# Altium PCB R100.230.020.001-00 MeasInUI.PcbDoc
Units mm, origin at the board's own origin, x right, y up, seen from the top; angles counter-clockwise.
Board outline 60 x 50 mm, 2 copper layers (Top, Bottom), stack 1.571 mm thick; 43 components, 31 nets, 118 pads, 82 vias.
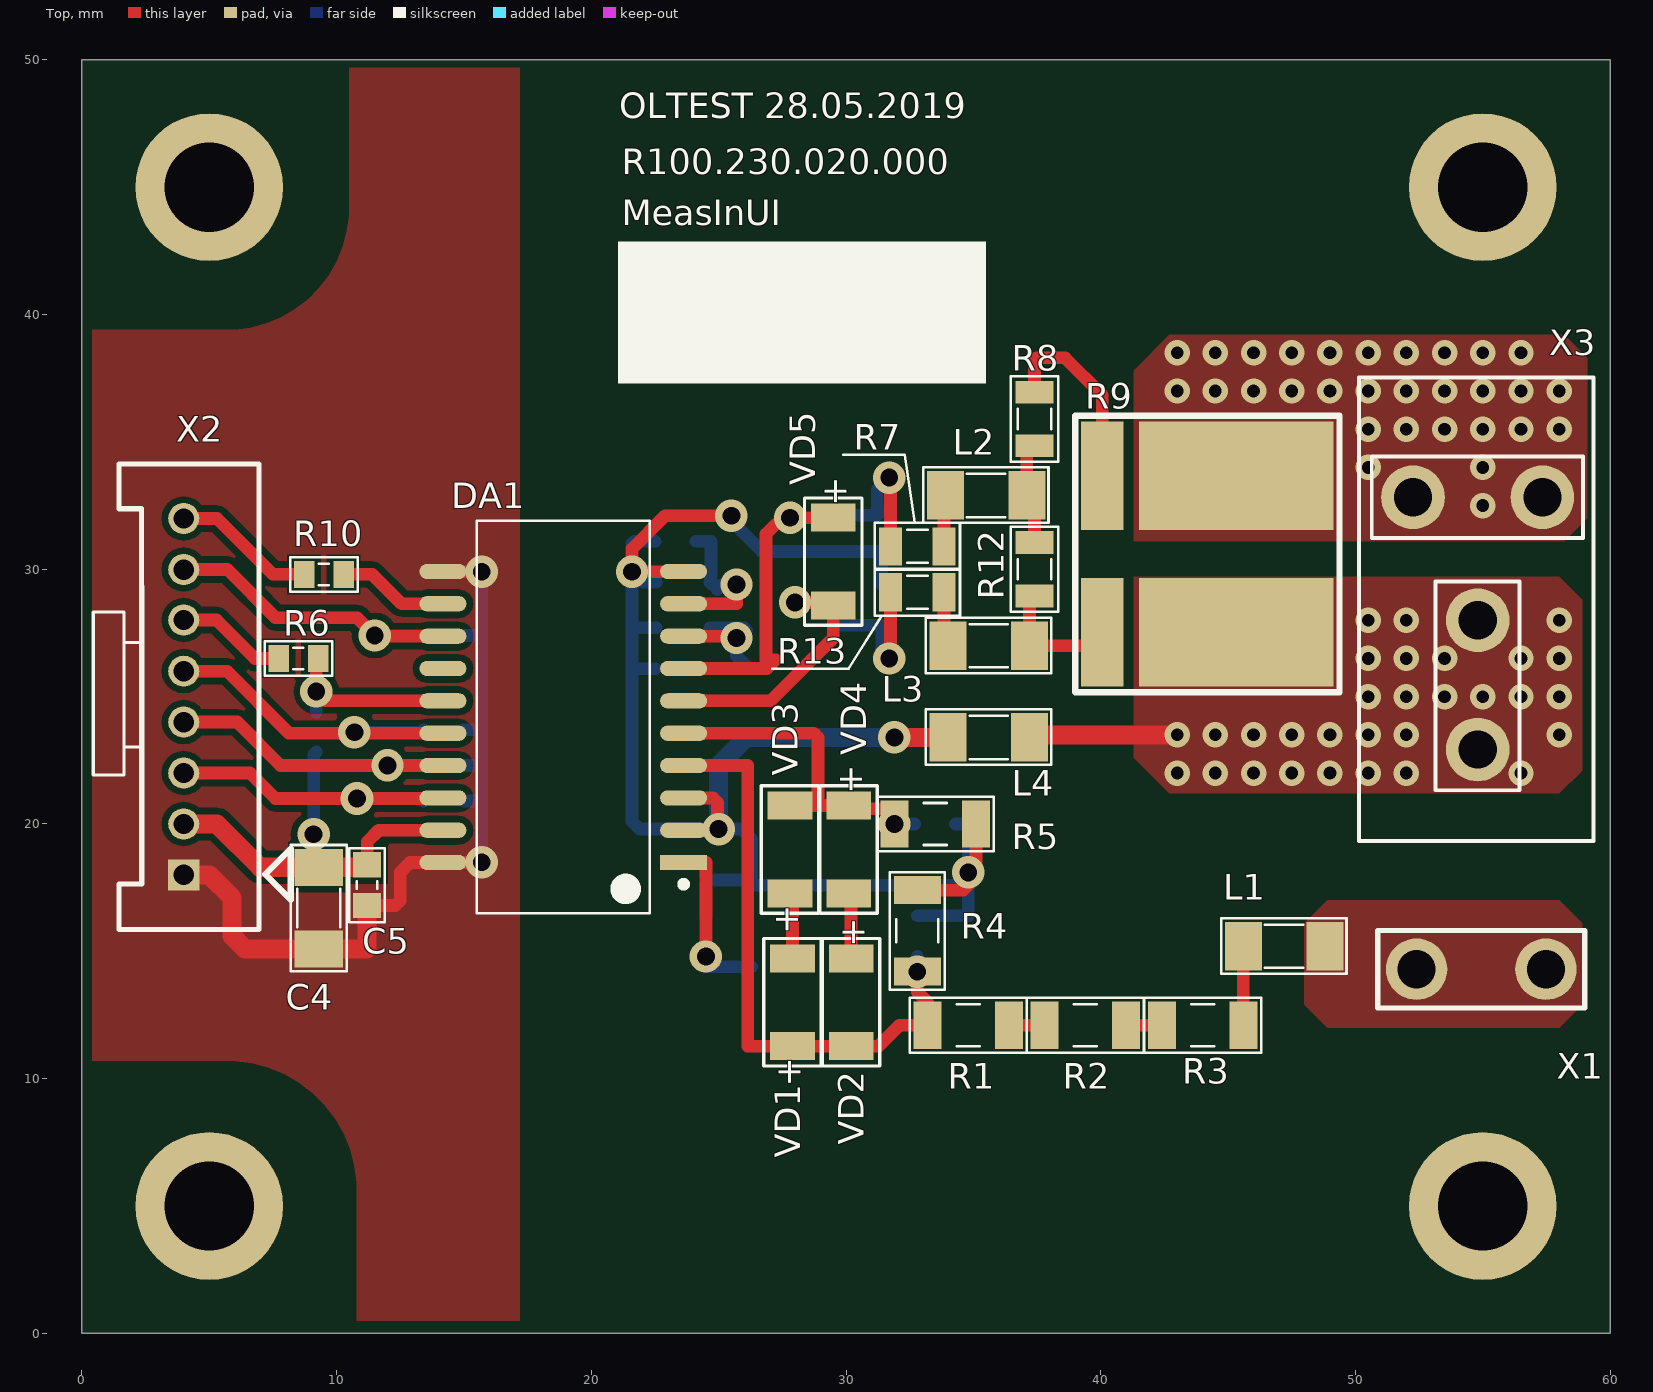
[diagram p0: Top view]
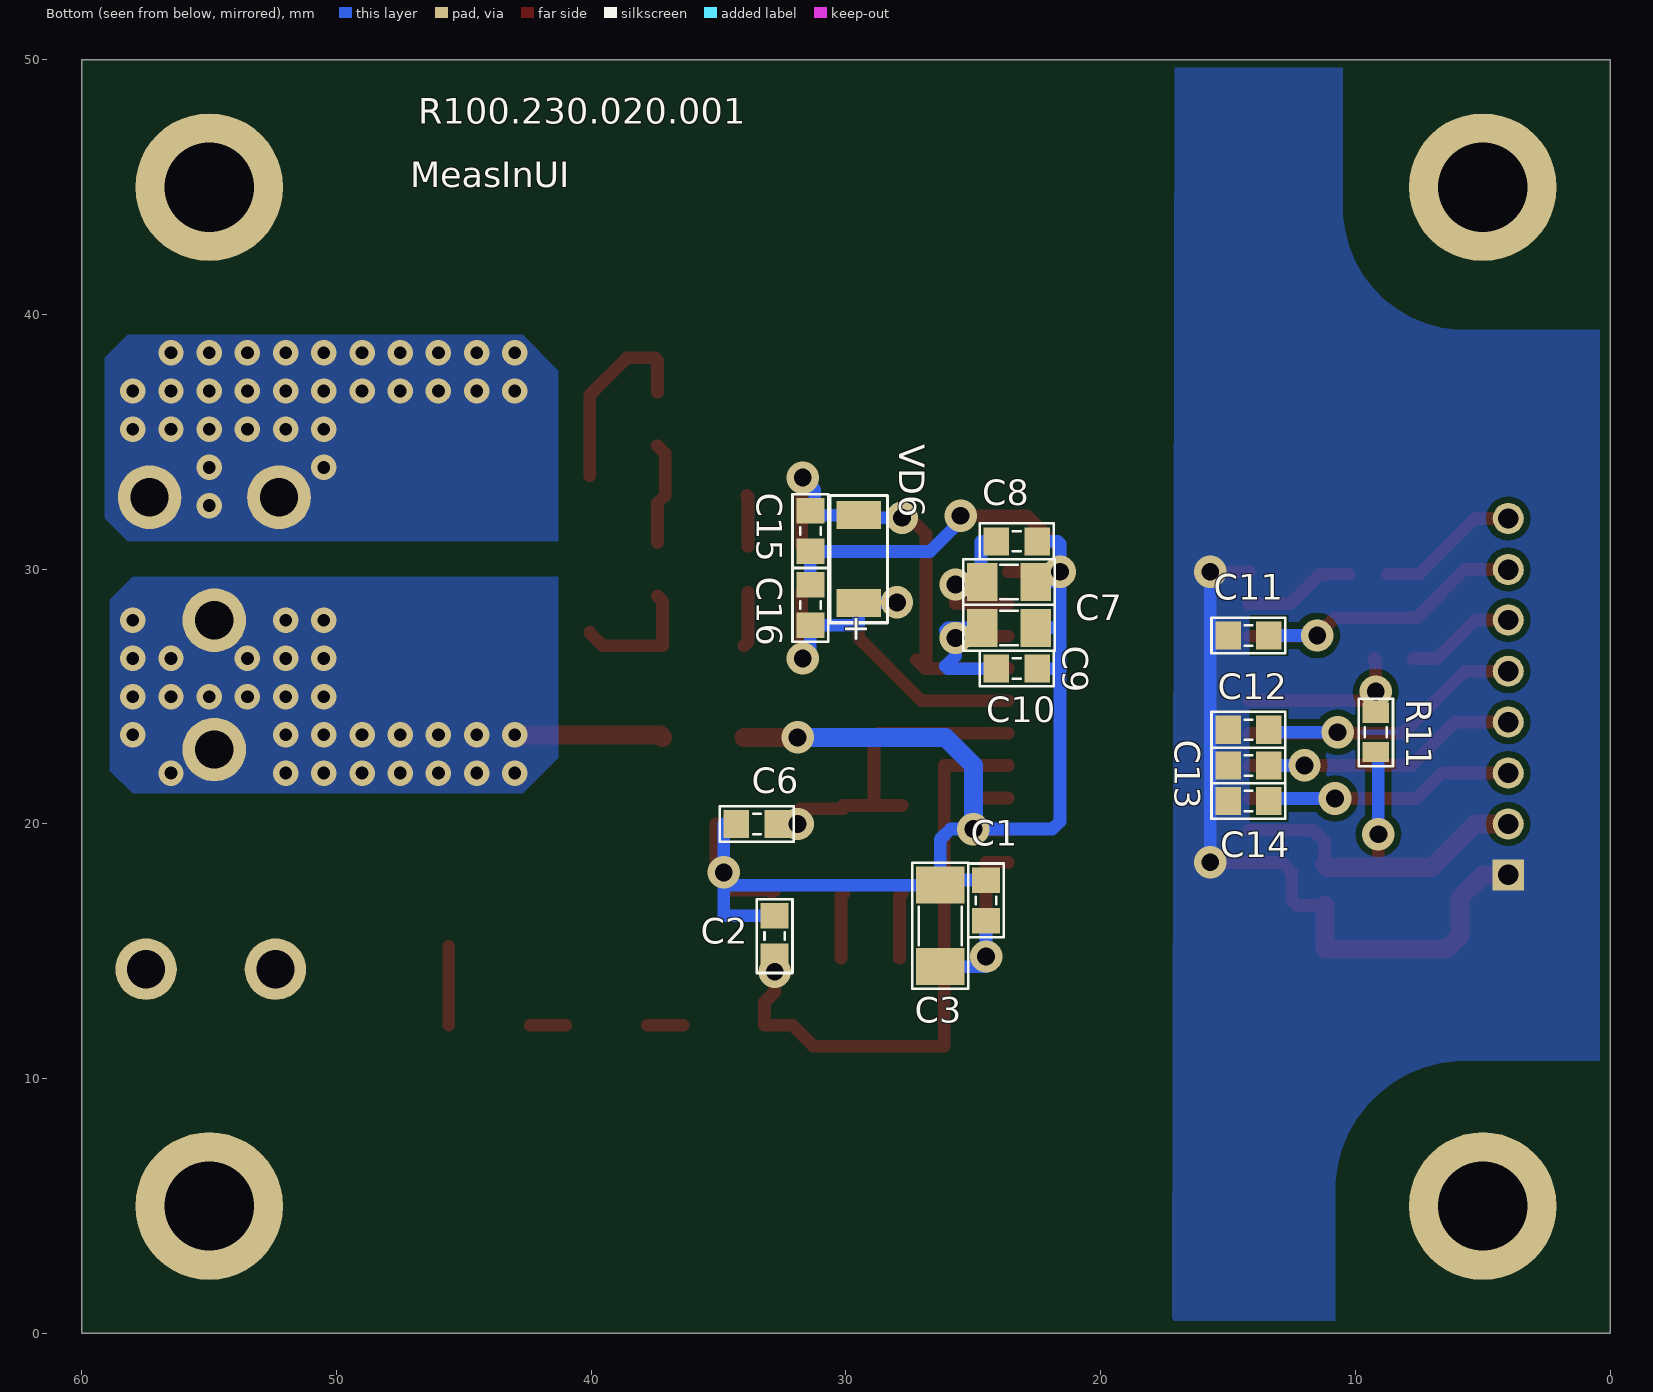
[diagram p1: Bottom view, seen from below]

## Layer stack, top to bottom
Top Solder: solder mask 0.0102, Solder Resist, Dk 3.5
Top: signal copper 0.0356
Dielectric 1: dielectric 1.5, FR-4, Dk 4.8
Bottom: signal copper 0.0356
Bottom Solder: solder mask 0.0102, Solder Resist, Dk 3.5

## Board outline
0,0 60,0 60,50 0,50

## Design rules (kind name [scope] priority, off if disabled: settings)
Clearance [All] p1: gap=0.254
HoleSize [All] p1: absolutevalues=TRUE maxlimit=4 minlimit=0.025 maxpercent=80.000 minpercent=20.000
PolygonConnect [All] p1: connectstyle=Direct reliefconductorwidth=0.254 reliefentries=4 polygonreliefangle="90 Angle" airgapwidth=0.254
RoutingVias [All] p1: holewidth=0.7 width=1.3 viastyle="Through Hole" minholewidth=0.4 minwidth=0.6 maxholewidth=1 maxwidth=1.8
SolderMaskExpansion [All] p1: expansion=0.102
Width [All] p1: maxlimit=1 minlimit=0.254 preferedwidth=0.75
29 further rules are at their usual default settings.

## Components (designator, comment, footprint, x,y, rotation, side; value= is the part's Value field where it differs from the comment)
C1 "0.1u" SMD_C_0603 24.5,17 r270 bottom
C2 "33nF" SMD_C_0603 32.8,15.6 r270 bottom
C3 "10u" SMD_C_1206 26.3,16 r270 bottom
C4 "10u" SMD_C_1206 9.3,16.7 r270 top
C5 "0.1u" SMD_C_0603 11.2,17.6 r270 top
C6 "33nF" SMD_C_0603 33.5,20 r0 bottom
C7 "4.7u" SMD_C_0805 23.6,29.5 r0 bottom
C8 "0.1u" SMD_C_0603 23.3,31.1 r180 bottom
C9 "4.7u" SMD_C_0805 23.6,27.7 r0 bottom
C10 "0.1u" SMD_C_0603 23.3,26.1 r0 bottom
C11 "100p" SMD_C_0603 14.2,27.4 r180 bottom
C12 "100p" SMD_C_0603 14.2,23.7 r180 bottom
C13 "100p" SMD_C_0603 14.2,22.3 r180 bottom
C14 "100p" SMD_C_0603 14.2,20.9 r180 bottom
C15 "33nF" SMD_C_0603 31.4,31.5 r90 bottom
C16 "33nF" SMD_C_0603 31.4,28.6 r90 bottom
DA1 "ADE7913ARIZ" "SOIC-20 WidBody (RI-20-1)" 18.9,24.2 r180 top
L1 "600R (100MHz)" SMD_L_1206 47.2,15.2 r0 top
L2 "600R (100MHz)" SMD_L_1206 35.5,32.9 r0 top
L3 "600R (100MHz)" SMD_L_1206 35.6,27 r0 top
L4 "600R (100MHz)" SMD_L_1206 35.6,23.4 r0 top
R1 "390K" SMD_R_1206 34.8,12.1 r0 top
R2 "390K" SMD_R_1206 39.4,12.1 r0 top
R3 "390K" SMD_R_1206 44,12.1 r0 top
R4 "1.5K" SMD_R_1206 32.8,15.8 r270 top
R5 "1.5K" SMD_R_1206 33.5,20 r0 top
R6 "100" SMD_R_0603 8.5,26.5 r0 top
R7 "1K" SMD_R_0805 32.8,30.9 r0 top
R8 "200" SMD_R_0805 37.4,35.9 r90 top
R9 "1mOm" "WSL3637 1mOm" 44.2,30.6 r90 top
R10 "100" SMD_R_0603 9.5,29.8 r0 top
R11 "10K" SMD_R_0603 9.2,23.6 r90 bottom
R12 "470" SMD_R_0805 37.4,30 r90 top
R13 "1K" SMD_R_0805 32.8,29.1 r0 top
VD1 "PMLL4148" SOD80C 27.9,13 r90 top
VD2 "PMLL4148" SOD80C 30.2,13 r270 top
VD3 "PMLL4148" SOD80C 27.8,19 r90 top
VD4 "PMLL4148" SOD80C 30.1,19 r270 top
VD5 "PMLL4148" SOD80C 29.5,30.3 r270 top
VD6 "PMLL4148" SOD80C 29.5,30.4 r90 bottom
X1 "63849-1" 63849-1 52.4,14.3 r0 top
X2 "Sherlock 8" 35362-0850 4,18 r270 top
X3 "926522-2" 63849-1x2 57.34,32.826 r180 top

## Footprints (in the part's own frame and the unit in brackets; to place one, negate y for a bottom-side part, rotate by r counter-clockwise, add the part's x,y. Pads: shape width x height; smd on the part's side, far side on the other; paste and mask are expansions set on the pad)
35362-0850 [mil]
  rect 48x48 / inner round 0 / far side rect 48x48 hole 31.5 mask+4.97: 1(0,0)
  round 48 / inner round 0 / far side round 48 hole 31.5 mask+4.97: 2(-78.73,0) 3(-157.47,0) 4(-236.22,0) 5(-314.95,0) 6(-394,0) 7(-472,0) 8(-551,0)
  silkscreen extent -635,-140 85,165, body extent -636,-102 85,116, height 335
63849-1 [mil]
  round 95 hole 59.06: 1(0,0) 2(200,0)
  silkscreen extent -60,-60 260,60, body extent -56,-60 256,61, height 409
63849-1x2 [mm]
  round 2.5 hole 1.5: 1(0,0) 2(5.08,0) 3(2.54,4.826) 4(2.54,9.906)
  silkscreen extent -2,-4.7 7.2,13.5, body extent -1.96,-4.7 7.19,13.45, height 25.03
SMD_C_0603 [mm]
  rect 1x1.1 smd: 1(-0.8,0) 2(0.8,0)
  silkscreen extent -1.45,-0.7 1.45,0.7, body extent -0.9,-0.45 0.9,0.45, height 0.7
SMD_C_0805 [mm]
  rect 1.2x1.5 smd: 1(-1.05,0) 2(1.05,0)
  silkscreen extent -1.8,-0.9 1.8,0.9, body extent -1.05,-0.67 1.05,0.68, height 0.7
SMD_C_1206 [mm]
  rect 1.45x1.9 smd: 1(-1.6,0) 2(1.6,0)
  silkscreen extent -2.47,-1.1 2.47,1.1, body extent -1.7,-0.9 1.7,0.9, height 1.6
SMD_L_1206 [mm]
  rect 1.45x1.9 smd: 1(-1.6,0) 2(1.6,0)
  silkscreen extent -2.47,-1.07 2.45,1.1, body extent -1.7,-0.9 1.7,0.9, height 1.6
SMD_R_0603 [mm]
  rect 0.8x1.05 smd: 1(-0.775,0) 2(0.775,0)
  silkscreen extent -1.33,-0.67 1.33,0.67, body extent -0.82,-0.48 0.82,0.48, height 0.5
SMD_R_0805 [mm]
  rect 0.9x1.5 smd: 1(-1.05,0) 2(1.05,0)
  silkscreen extent -1.68,-0.92 1.68,0.92, body extent -1.1,-0.7 1.1,0.7, height 0.5
SMD_R_1206 [mm]
  rect 1.1x1.85 smd: 1(-1.6,0) 2(1.6,0)
  silkscreen extent -2.3,-1.07 2.3,1.07, body extent -1.65,-0.87 1.65,0.87, height 0.6
SOD80C [mm] "MELF Diode, 2-Leads, Body 3,50x1,53mm, IPC Medium Density"
  rect 1.1x1.75 smd: 1(-1.725,0) 2(1.725,0)
  silkscreen extent -2.5,-1.12 2.5,1.12, body extent -1.85,-0.8 1.85,0.8, height 1.6
"SOIC-20 WidBody (RI-20-1)" [mm] "ADE7912A"
  rect 1.85x0.6 smd: 1(-4.725,5.715)
  oval 1.85x0.6 smd: 2(-4.725,4.445) 3(-4.725,3.175) 4(-4.725,1.905) 5(-4.725,0.635) 6(-4.725,-0.635) 7(-4.725,-1.905) 8(-4.725,-3.175) 9(-4.725,-4.445) 10(-4.725,-5.715) 11(4.725,-5.715) 12(4.725,-4.445) 13(4.725,-3.175) 14(4.725,-1.905) 15(4.725,-0.635) 16(4.725,0.635) 17(4.725,1.905) 18(4.725,3.175) 19(4.725,4.445) 20(4.725,5.715)
  silkscreen extent -4.85,-7.7 3.4,7.7, body extent -5.16,-7.7 5.16,7.7, height 2.54
"WSL3637 1mOm" [mm]
  rect 4.27x7.64 smd: 1(-3.075,-1.125) 3(3.075,-1.125)
  rect 4.27x1.66 smd: 2(-3.075,4.135) 4(3.075,4.135)
  silkscreen extent -5.43,-5.17 5.43,5.2, body extent -4.59,-4.47 4.55,4.93, height 0.64

## Part data
C1 C5 C8 C10: library part "C0603 0.1u 50V 10%", "SMD C 0603 MURATA 50V 10% X7R"
C2 C6 C15 C16: library part "C0603 33nF 50V 10%", "SMD C 0603 MURATA 50V 10% X7R"
C3 C4: library part "C1206 10u 25V 20%", "SMD C 1206 MURATA 25V 20% X5R"
C7 C9: library part "C0805 4.7u 25V 20%  X5R", "SMD C 0805 MURATA 50V 5% NP0"
C11 C12 C13 C14: library part "C0603 100p 100V 5%", "SMD C 0603 MURATA 100V 5% NP0"
DA1: "Isolated, Sigma-Delta ADC with SPI"
L1 L2 L3 L4: library part BLM31PG601SN1, "600R 1.5A (100MHz)"
R1 R2 R3: library part "R1206 390K 1%", "SMD R 1206 VISHAY 0.25W 200V 1% 100ppm"
R4 R5: library part "R1206 1.5K 1%", "SMD R 1206 VISHAY 0.25W 200V 1% 100ppm"
R6 R10: library part "R0603 100 1%", "SMD R 0603 VISHAY 0.1W 75V 1% 100ppm"
R7 R13: library part "R0805 1K 1%", "SMD R 0805 VISHAY 0.125W 150V 1% 100ppm"
R8: library part "R0805 200 1%", "SMD R 0805 VISHAY 0.125W 150V 1% 100ppm"
R9: library part "WSL3637 1mOm 3W", "WSL3637 1mOm 3W 1% 75ppm"
R11: library part "R0603 10К 1%", "SMD R 0603 VISHAY 0.1W 75V 1% 100ppm"
R12: library part "R0805 470 1%", "SMD R 0805 VISHAY 0.125W 150V 1% 100ppm"
VD1 VD2 VD3 VD4 VD5 VD6: "If=0.2A, Vf=1V Vrrm=100V Diode (SOD80C)"
X1: "PCB, 6.3х0.8, hole"
X2: library part 35362-0850, "Sherlock 8 Side, 2A 125V 2mm"
X3: library part 63849-1x2, "DUAL TAB FASTON PCB (926522-2)"

## Free pads (board coordinates)
  round 5.8 hole 3.5: 1(5,5) 1(5,45) 1(55,5) 1(55,45)

## Via types
v1: diameter 1, hole 0.5, Top to Bottom, 60 vias
v2: diameter 1.27, hole 0.7, Top to Bottom, 21 vias
v3: diameter 1.3, hole 0.7, Top to Bottom, 1 vias

## Nets (pads, with @x,y where several pads share a name; then routed paths per layer and width w, separated by ;. In a path a pad name is that pad's centre, name@x,y a point inside that pad or via, vN(x,y) a via of type N, cw(c..) or ccw(c..) an arc to the next point about the centre after c; other vN are vias at no path point)
+V3_C: C4.1 C5.1 DA1.19 R11.1 X2.2 | length 16.6
  Top w0.5: C4.1@9.1,18.3 v2(9.1,19.6) ; C5.1 11.2,19.3 11.655,19.755 DA1.19
  Top w0.75: X2.2 5.3,20 7,18.3 9.1,18.3 C4.1 11.1,18.3 C5.1
  Bottom w0.5: v2(9.1,19.6) 9.1,22.725 R11.1
ADC2_CS_M: C14.2 DA1.18 X2.3 | length 13.2
  Top w0.5: X2.3 6.6,22 7.6,21 v3(10.8,21) 14.15,21 DA1.18
  Bottom w0.5: v3(10.8,21) 13.3,21 C14.2
ADC2_DRDY_M: R10.1 X2.8 | length 5.6
  Top w0.5: X2.8 5.304,31.996 7.5,29.8 R10.1
ADC2_SCLK_M: C13.2 DA1.17 X2.4 | length 12.3
  Top w0.5: X2.4 6.1,24 7.8,22.3 v2(12,22.3) 14.17,22.3 DA1.17
  Bottom w0.5: v2(12,22.3) C13.2
ADC2_SDI_M: C12.2 DA1.16 X2.5 | length 13.9
  Top w0.5: X2.5 5.7,26 8.135,23.565 DA1.16
  Bottom w0.5: v2(10.7,23.6) 13.3,23.6 C12.2
ADC2_SDO_M: R6.1 X2.6 | length 4.3
  Top w0.5: X2.6 5.292,28.008 6.8,26.5 R6.1
ADC2_SYN_M: C11.2 DA1.13 X2.7 | length 13.2
  Top w0.5: X2.7 5.711,29.989 7.6,28.1 10.8,28.1 v2(11.5,27.4) 11.525,27.375 DA1.13
  Bottom w0.5: v2(11.5,27.4) C11.2
GND_C: C4.2 C5.2 C11.1 C12.1 C13.1 C14.1 DA1.11 DA1.20 X2.1 | length 32.6
  Top w0.5: C5.2 12.3,16.8 12.5,17 12.5,18.1 12.885,18.485 DA1.20 15.685,18.485 v2(15.7,18.5) ; DA1.11 14.19,29.9 v2(15.7,29.9)
  Top w0.75: X2.1 5,18 5.9,17.1 5.9,15.6 6.4,15.1 C4.2 11.2,15.1 C5.2
  Bottom w0.5: C14.1 15.7,20.9 ; C13.1 15.7,22.3 ; C12.1 15.6,23.7 15.7,23.6 ; C11.1 15.7,27.4 ; v2(15.7,18.5) 15.7,20.9 ; v2(15.7,29.9) 15.7,27.4 ; 15.7,20.9 15.7,22.3 ; 15.7,22.3 15.7,23.6 ; 15.7,23.6 15.7,27.4
GND_MC: C1.1 C2.1 C3.1 C6.2 C7.1 C8.2 C9.1 C10.1 C15.1 C16.2 DA1.2 DA1.3 DA1.10 L4.1 R4.1 R5.2 | length 73.9
  Top w0.5: DA1.2 24.955,19.755 24.955,20.845 24.775,21.025 DA1.3 ; DA1.10 23.61,29.9 v2(21.6,29.9) 21.6,30.8 22.9,32.1 v2(25.5,32.1) ; R4.1 32.9,17.3 33,17.4 34.6,17.4 34.8,17.6 v2(34.8,18.1) 35.1,18.4 R5.2
  Top w0.75: v2(31.9,23.4) L4.1
  Bottom w0.5: C10.1 21.7,26.1 21.6,26 ; C8.2 21.7,31.1 21.6,31 v2(21.6,29.9) ; C9.1 21.6,27.7 ; C7.1 22,29.5 v2(21.6,29.9) ; C1.1 26.1,17.8 C3.1 ; v2(25.5,32.1) 25.5,31.9 26.7,30.7 C15.1 C16.2 ; C2.1 34.8,16.4 v2@34.8,17.6 ; C6.2 34.8,20 v2(34.8,18.1) v2@34.8,17.6 ; 21.6,26 21.6,27.7 ; 21.6,26 21.6,20.1 21.9,19.8 v2(25,19.8) 25.9,19.8 26.3,19.4 C3.1 ; 21.6,27.7 v2(21.6,29.9) ; C3.1 v2@34.8,17.6
  Bottom w0.75: v2(25,19.8) 25,22.3 26.1,23.4 v2(31.9,23.4)
NetC1_2: C1.2 C3.2 DA1.1 | length 8.2
  Top w0.5: DA1.1 23.64,18.5 24.5,18.5 v2(24.5,14.8)
  Bottom w0.5: C1.2 v2(24.5,14.8) 24.5,14.4 C3.2
NetC2_2: C2.2 DA1.4 R1.1 R4.2 VD1.1 VD2.2 | length 23.8
  Top w0.5: DA1.4 26.139,22.295 26.139,11.275 VD1.1 VD2.2 31.275,11.275 32.1,12.1 R1.1 33.2,13 32.8,13.4 v2(32.8,14.2)
  Bottom w0.5: v2(32.8,14.2) C2.2
NetC6_1: C6.1 DA1.5 R5.1 VD3.2 VD4.1 | length 13.6
  Top w0.5: DA1.5 28.735,23.565 28.9,23.4 28.9,20.725 ; VD3.2 28.9,20.725 ; v2(31.9,20) 31.8,20.1 31.8,20.6 30.1,20.6 VD4.1 28.9,20.725
  Bottom w0.5: v2(31.9,20) C6.1
NetC7_2: C7.2 C8.1 DA1.9 | length 6.3
  Top w0.5: DA1.9 25.7,28.645 v2(25.7,29.4)
  Bottom w0.5: C8.1 24.689,31.1 24.7,31.089 24.7,29.55 C7.2 24.95,29.2 25.15,29.4 v2(25.7,29.4)
NetC9_2: C9.2 C10.2 DA1.8 | length 8.1
  Top w0.5: DA1.8 26.025,27.375 25.95,27.3 v2(25.7,27.3)
  Bottom w0.5: C10.2 26,26.1 26.1,26.2 25.7,26.6 v2(25.7,27.3) 25.8,27.3 26.1,27.6 26,27.7 C9.2
NetC15_2: C15.2 DA1.7 R7.1 VD5.1 VD6.2 | length 19.5
  Top w0.5: DA1.7 26.895,26.105 27.239,26.449 26.861,26.449 26.861,31.383 v2@27.239,31.761 ; v2(27.8,32.025) VD5.1 ; v2(31.7,33.6) 31.75,33.55 R7.1
  Bottom w0.5: v2(27.8,32.025) 29.5,32.025 VD6.2 C15.2@31.225,32.125 ; C15.2 C15.2@31.225,32.125 ; v2(31.7,33.6) 31.225,33.125 C15.2@31.225,32.125
NetC16_1: C16.1 DA1.6 R13.1 VD5.2 VD6.1 | length 18.1
  Top w0.5: DA1.6 27.035,24.835 29.5,27.3 VD5.2 29.5,28.7 v2(28,28.7) ; v2(31.7,26.5) 31.75,26.55 R13.1
  Bottom w0.5: v2(28,28.7) 29.5,28.7 VD6.1 29.5,27.8 C16.1 31.4,26.8 v2(31.7,26.5)
NetDA1_12: DA1.12 R10.2 | length 4.4
  Top w0.5: R10.2 11.4,29.8 12.555,28.645 DA1.12
NetDA1_15: DA1.15 R6.2 R11.2 | length 7.3
  Top w0.5: R6.2 9.2,26.425 v2(9.2,25.2) 9.565,24.835 DA1.15
  Bottom w0.5: R11.2 v2(9.2,25.2)
NetL1_1: L1.1 R3.2 | length 3.1
  Top w0.5: R3.2 L1.1
NetL1_2: L1.2 X1.1 X1.2
NetL2_1: L2.1 R7.2 | length 2
  Top w0.5: R7.2 33.85,32.85 L2.1
NetL2_2: L2.2 R8.1 R12.2 | length 4
  Top w0.5: R12.2 37.4,32.6 L2.2 37.1,34.55 R8.1
NetL3_1: L3.1 R13.2 | length 2.2
  Top w0.5: R13.2 33.85,27.15 L3.1
NetL3_2: L3.2 R9.2 R12.1 | length 5.1
  Top w0.5: R12.1 37.2,28.75 L3.2 39.54,27 R9.2
NetL4_2: L4.2 R9.1 X3.3 X3.4 | length 5.8
  Top w0.75: L4.2 37.3,23.5 v1(43,23.5)
  other v1: 43,22 44.5,22 46,22 47.5,22 49,22 50.5,22 52,22 56.5,22 44.5,23.5 46,23.5 47.5,23.5 49,23.5 50.5,23.5 52,23.5 58,23.5 50.5,25 52,25 53.5,25 55,25 56.5,25 58,25 50.5,26.5 52,26.5 53.5,26.5 56.5,26.5 58,26.5 50.5,28 52,28 58,28
NetR1_2: R1.2 R2.1 | length 1.4
  Top w0.5: R1.2 R2.1
NetR2_2: R2.2 R3.1 | length 1.4
  Top w0.5: R2.2 R3.1
NetR8_2: R8.2 R9.4 | length 7.7
  Top w0.5: R8.2 37.4,38.2 37.5,38.3 38.6,38.3 40.065,36.835 R9.4
NetR9_3: R9.3 X3.1 X3.2
  other v1: 55,32.5 50.5,34 55,34 50.5,35.5 52,35.5 53.5,35.5 55,35.5 56.5,35.5 58,35.5 43,37 44.5,37 46,37 47.5,37 49,37 50.5,37 52,37 53.5,37 55,37 56.5,37 58,37 43,38.5 44.5,38.5 46,38.5 47.5,38.5 49,38.5 50.5,38.5 52,38.5 53.5,38.5 55,38.5 56.5,38.5
NetVD1_2: VD1.2 VD3.1 | length 2.6
  Top w0.5: VD3.1 27.9,17.175 VD1.2
NetVD2_1: VD2.1 VD4.2 | length 2.6
  Top w0.5: VD4.2 30.2,17.175 VD2.1
pads on no net: DA1.14

## Polygon pours and split planes (outlines as drawn)
GND_C on Top "Top Overlay-No Net" (solid, pour order 14): 0.4,39.4 5.7,39.4 ccw(c5.7,44.2) 10.5,44.2 10.5,49.7 17.1,49.7 17.2,49.7 17.2,0.5 10.8,0.5 10.8,5.6 ccw(c5.7,5.6) 5.7,10.7 0.4,10.7
NetL1_2 on Top "Top Overlay-No Net" (solid, pour order 10): 48,16.1 48,12.9 48.9,12 58,12 58.9,12.9 58.9,16.1 58,17 48.9,17
NetL4_2 on Top "Top Overlay-No Net" (solid, pour order 8): 41.3,29.7 41.3,22.6 42.7,21.2 58,21.2 58.9,22.1 58.9,28.8 58,29.7
NetR9_3 on Top "Top Overlay-No Net" (solid, pour order 0): 41.3,37.8 41.3,31.1 58.2,31.1 59.1,32 59.1,38.3 58.2,39.2 42.7,39.2
GND_C on Bottom "Top Overlay-No Net" (solid, pour order 12): 0.4,39.4 5.7,39.4 ccw(c5.7,44.2) 10.5,44.2 10.5,49.7 17.1,49.7 17.2,0.5 10.8,0.5 10.8,5.6 ccw(c5.7,5.6) 5.7,10.7 0.4,10.7
NetL4_2 on Bottom "Top Overlay-No Net" (solid, pour order 6): 41.3,29.7 41.3,22.6 42.7,21.2 58,21.2 58.9,22.1 58.9,28.8 58,29.7
NetR9_3 on Bottom "Top Overlay-No Net" (solid, pour order 2): 41.3,37.8 41.3,31.1 58.2,31.1 59.1,32 59.1,38.3 58.2,39.2 42.7,39.2

## Silkscreen, mask and mechanical layers (free items; w line width, h text height)
Top Overlay:
  rectangle: 21.05,37.3 35.5,42.875
  lines w0.1: 27.1,26.1 30.1,26.1 31.4,28.175 ; 29.9,34.5 32.3,34.5 32.7,31.825
  text "OLTEST 28.05.2019" at 21.1,47.7 h1
  text "R100.230.020.000" at 21.2,45.5 h1
  text "MeasInUI" at 21.2,43.5 h1
Bottom Overlay:
  text "R100.230.020.001" at 46.8,47.5 h1
  text "MeasInUI" at 47.1,45 h1
Board:
  the board outline again, w0.254

## Dimensions
0,50 to 60,50 on Mechanical 16
0,0 to 55,5 on Mechanical 16
60,50 to 60,0 on Mechanical 16
0,0 to 5,45 on Mechanical 16
0,0 to 5,5 on Mechanical 16
0,0 to 5,5 on Mechanical 16

## Text inside footprints (layer, text, board x,y; h text height)
VD1: Top Overlay "+" at 28.225,9.675 h1 r90
VD2: Top Overlay "+" at 29.875,16.325 h1 r270
VD3: Top Overlay "+" at 28.125,15.675 h1 r90
VD4: Top Overlay "+" at 29.775,22.325 h1 r270
VD5: Top Overlay "+" at 29.175,33.625 h1 r270
VD6: Bottom Overlay "+" at 29.175,27.075 h1 r270